# Altium PCB emote2-gsm_gps-pcb_document.PcbDoc
Units mm, origin at the board's own origin, x right, y up, seen from the top; angles counter-clockwise.
Board outline 40 x 40 mm, 2 copper layers (Top Layer, Bottom Layer), stack 1.671 mm thick; 36 components, 63 nets, 204 pads, 96 vias.
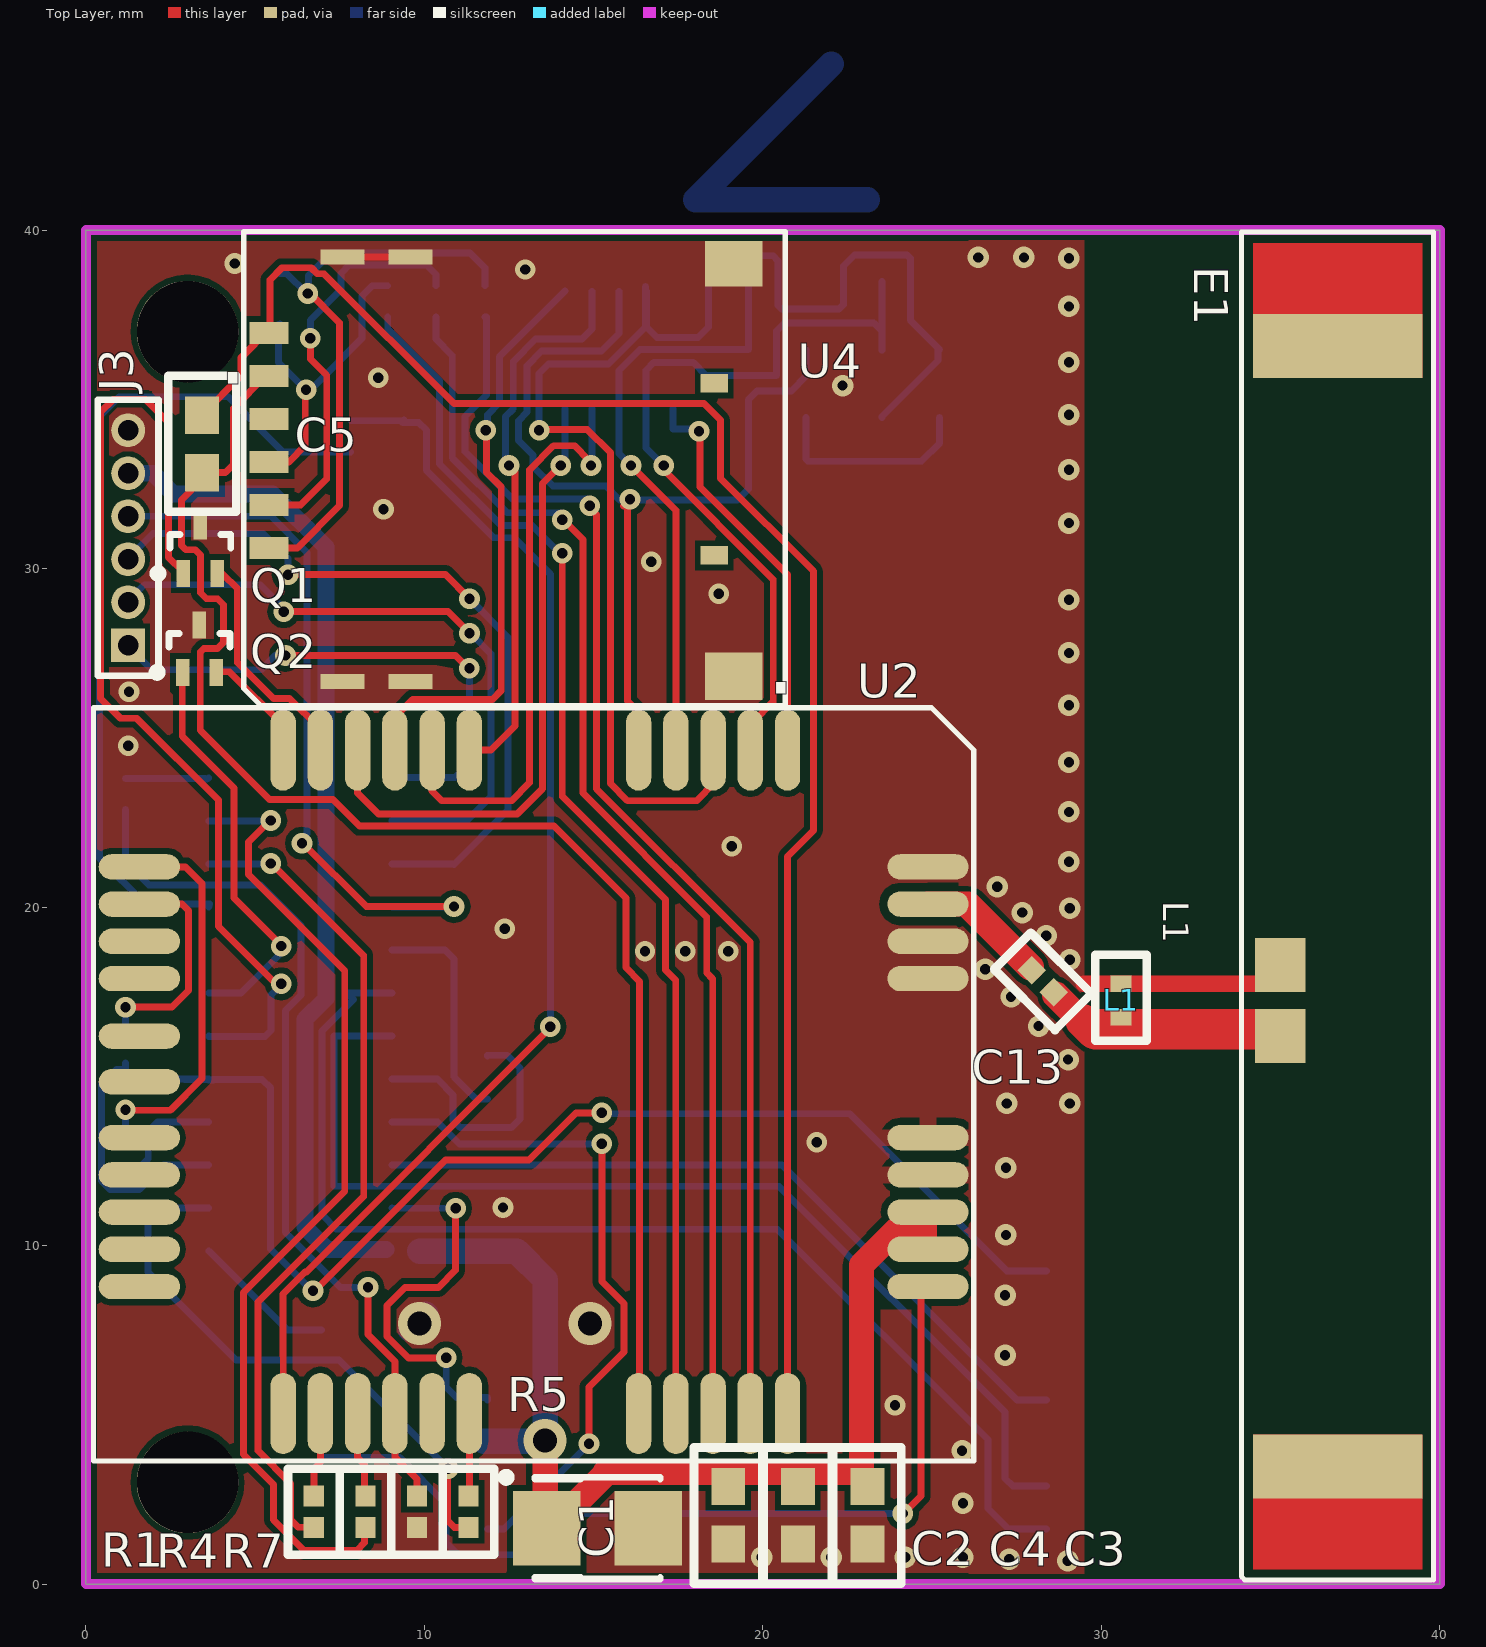
[diagram p0: Top Layer view]
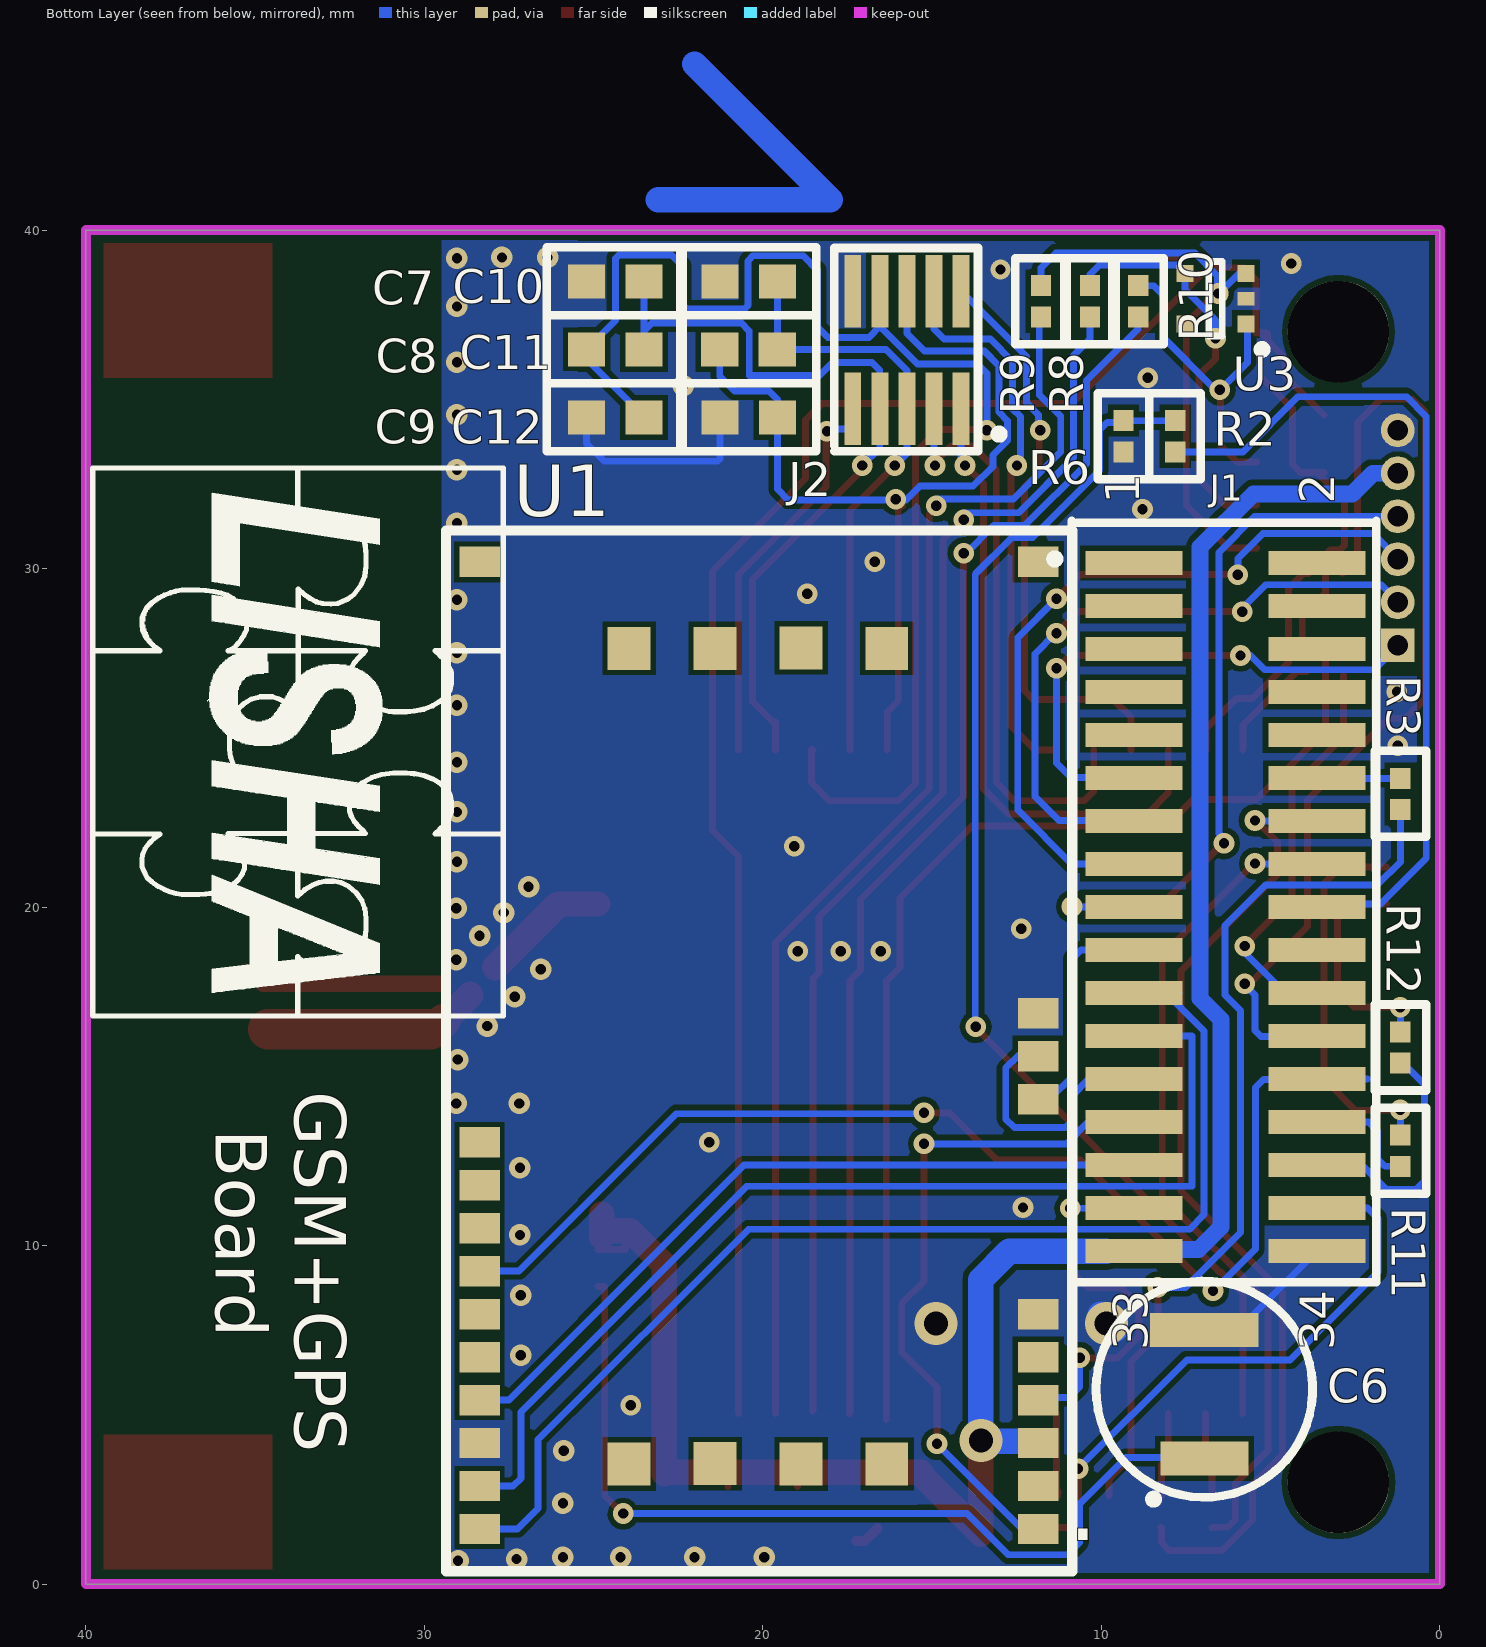
[diagram p1: Bottom Layer view, seen from below]

## Layer stack, top to bottom
Top Layer: signal copper 0.0356
Dielectric: core 1.6, FR-4, Dk 4.3
Bottom Layer: signal copper 0.0356

## Board outline
0,0 40,0 40,40 0,40

## Design rules (kind name [scope] priority, off if disabled: settings)
Clearance Clearance_5 [InNamedPolygon('Top Layer-No Net1_1')] p1: gap=0.25
Clearance Clearance_4 [InNamedPolygon('Top Layer-No Net3')] p2: gap=0.2
Clearance Clearance_3 [InNamedPolygon('Bottom Layer-No Net2')] p3: gap=0.17
Clearance Clearance_2 [InNamedPolygon('Top Layer-No Net2') Or  InNamedPolygon('Top Layer-No Net2')] p4: gap=0.18
Clearance Clearance_1 [InNamedPolygon('Top Layer-No Net1')] p5: gap=0.15
Clearance [All] p6: gap=0.15
ComponentClearance [All] p1: gap=0.051 collisioncheckmode=3 verticalgap=0.254 showdistances=FALSE
FabricationTestPointUsage TestPointUsage [All] p1: valid=0 allowmultiple=FALSE
FabricationTestpoint Testpoint [(IsPad And (OnTopLayer Or OnBottomLayer))] p1: side=3 testpointundercomponent=TRUE minsize=1.016 maxsize=2.54 preferedsize=1.524 minholesize=0 maxholesize=1.016 preferedholesize=0.813 testpointgrid=0.025 allowsidetop=TRUE allowsidebottom=TRUE usegrid=TRUE gridtolerance=0
HoleSize [All] p1: absolutevalues=TRUE maxlimit=5.08 minlimit=0.025 maxpercent=80.000 minpercent=20.000
PolygonConnect PolygonConnect_15 [All vs IsNamedPolygon('Top Layer-No Net1_1')] p1: connectstyle=Direct reliefconductorwidth=0.254 reliefentries=4 polygonreliefangle="90 Angle"
PolygonConnect PolygonConnect_14 [All vs IsNamedPolygon('Bottom Layer-No Net2')] p2: connectstyle=Direct reliefconductorwidth=0.254 reliefentries=4 polygonreliefangle="90 Angle"
PolygonConnect PolygonConnect_13 [All vs IsNamedPolygon('Top Layer-No Net2') Or  IsNamedPolygon('Top Layer-No Net2')] p3: connectstyle=Direct reliefconductorwidth=0.254 reliefentries=4 polygonreliefangle="90 Angle"
PolygonConnect PolygonConnect_12 [All vs IsNamedPolygon('Bottom Layer-No Net')] p4: connectstyle=Direct reliefconductorwidth=0.254 reliefentries=4 polygonreliefangle="90 Angle"
PolygonConnect PolygonConnect_11 [All vs IsNamedPolygon('Top Layer-No Net')] p5: connectstyle=Direct reliefconductorwidth=0.254 reliefentries=4 polygonreliefangle="90 Angle"
PolygonConnect PolygonConnect_10 [All vs IsNamedPolygon('Top Layer-No Net')] p6: connectstyle=Relief reliefconductorwidth=0.254 reliefentries=4 polygonreliefangle="90 Angle"
PolygonConnect PolygonConnect_9 [All vs IsNamedPolygon('Top Layer-No Net')] p7: connectstyle=Direct reliefconductorwidth=0.254 reliefentries=4 polygonreliefangle="90 Angle"
PolygonConnect PolygonConnect_8 [All vs IsNamedPolygon('Top Layer-No Net')] p8: connectstyle=Relief reliefconductorwidth=0.254 reliefentries=4 polygonreliefangle="90 Angle"
PolygonConnect PolygonConnect_7 [All vs IsNamedPolygon('Top Layer-No Net')] p9: connectstyle=Direct reliefconductorwidth=0.254 reliefentries=4 polygonreliefangle="90 Angle"
PolygonConnect PolygonConnect_6 [All vs IsNamedPolygon('Top Layer-No Net')] p10: connectstyle=Relief reliefconductorwidth=0.254 reliefentries=4 polygonreliefangle="90 Angle"
PolygonConnect PolygonConnect_5 [All vs IsNamedPolygon('Top Layer-No Net1')] p11: connectstyle=Direct reliefconductorwidth=0.254 reliefentries=4 polygonreliefangle="90 Angle"
PolygonConnect PolygonConnect_4 [All vs IsNamedPolygon('Top Layer-No Net1')] p12: connectstyle=Direct reliefconductorwidth=0.254 reliefentries=4 polygonreliefangle="90 Angle"
PolygonConnect PolygonConnect_3 [All vs IsNamedPolygon('Top Layer-No Net')] p13: connectstyle=Direct reliefconductorwidth=0.254 reliefentries=4 polygonreliefangle="90 Angle"
PolygonConnect PolygonConnect_2 [All vs IsNamedPolygon('Top Antenna - GND') Or  IsNamedPolygon('Bottom Antenna - GND')] p14: connectstyle=Direct reliefconductorwidth=0.254 reliefentries=4 polygonreliefangle="90 Angle"
PolygonConnect PolygonConnect_1 [All vs IsNamedPolygon('Bottom Layer-No Net 1')] p15: connectstyle=Direct reliefconductorwidth=0.254 reliefentries=4 polygonreliefangle="90 Angle"
PolygonConnect [All] p16: connectstyle=Relief reliefconductorwidth=0.508 reliefentries=4 polygonreliefangle="90 Angle"
RoutingCorners [All] p1: cornerstyle=45-Degree minsetback=1.27 maxsetback=1.27
RoutingVias [All] p1: holewidth=0.305 width=0.61 viastyle="Through Hole" minholewidth=0.254 minwidth=0.559 maxholewidth=0.711 maxwidth=1.27
SMDNeckDown [All] p1: percent=50.000
SilkscreenOverComponentPads [All] p1: minsilkscreentomaskgap=0
SolderMaskExpansion [All] p1: expansion=0.102
Width [All] p1: maxlimit=2.54 minlimit=0.15 preferedwidth=0.15
22 further rules are at their usual default settings.

## Components (designator, comment, footprint, x,y, rotation, side; value= is the part's Value field where it differs from the comment)
C1 "100uF" TC3528-1411 15.113,1.651 r0 top
C2 "10pF" 0603 18.974,2.032 r90 top
C3 "33pF" 0603 23.089,2.032 r90 top
C4 "100nF" 0603 21.031,2.032 r90 top
C5 "100nF" 0603 3.429,33.68 r270 top
C6 "60mF (*)" PAS414HR-VE5R 6.96,5.207 r90 bottom
C7 "33pF(*)" 0603 24.364,38.481 r180 bottom
C8 "33pF(*)" 0603 24.364,36.474 r180 bottom
C9 "33pF(*)" 0603 24.364,34.468 r180 bottom
C10 "33pF(*)" 0603 20.422,38.481 r180 bottom
C11 "33pF(*)" 0603 20.427,36.474 r180 bottom
C12 "33pF(*)" 0603 20.422,34.468 r180 bottom
C13 "3.3pF" 0402#1 28.27,17.805 r135 top
E1 "PA.25A" PA-25A_ANTENA 34.483,39.624 r270 top locked
J1 "Header 17X2M" FTR-117-D-BOTTOM 3.627,30.16 r90 bottom locked
J2 "Header 5X2(*)" "BB080 2x5 CON" 14.148,34.722 r180 bottom
J3 "Header 6" MHDR1X6 1.245,27.737 r90 top
L1 "2nH" 0402#2 30.582,17.323 r270 top
Q1 "DTC143ZE" SOT416-3L 3.378,30.556 r90 top
Q2 "DTC143ZE" SOT416-3L 3.353,27.635 r90 top
R1 "1K" 0402#3 6.731,2.134 r90 top
R2 "1K" 0402#3 7.824,33.909 r90 bottom
R3 "1K" 0402#3 1.168,23.343 r270 bottom
R4 "1K" 0402#3 8.255,2.134 r90 top
R5 "1K" 0402#3 11.303,2.134 r90 top
R6 "5K6" 0402#3 9.348,33.909 r270 bottom
R7 "5K6" 0402#3 9.779,2.134 r270 top
R8 "22R" 0402#3 10.338,37.897 r90 bottom
R9 "22R" 0402#3 11.786,37.897 r90 bottom
R10 "22R" 0402#3 8.915,37.897 r90 bottom
R11 "1K" 0402#3 1.168,12.802 r90 bottom
R12 "1K" 0402#3 1.168,15.85 r90 bottom
U1 "A2035-H" A2035-H 11.862,1.626 r0 bottom
U2 "M95" M95 20.726,24.638 r270 top
U3 "PESD5V0L4UG" SOT353/SC-88A 6.629,37.973 r0 bottom
U4 "CONN-SIM" MICRO-SIM 5.41,36.957 r0 top

## Footprints (in the part's own frame and the unit in brackets; to place one, negate y for a bottom-side part, rotate by r counter-clockwise, add the part's x,y. Pads: shape width x height; smd on the part's side, far side on the other; paste and mask are expansions set on the pad)
0402#1 [mm]
  rect 0.6x0.6 smd: 1(0.46,0) 2(-0.46,0)
  silkscreen extent -1.27,-0.76 1.27,0.76, body extent -0.79,-0.79 0.79,0.79, height 0.2
0402#2 [mm]
  rect 0.5x0.62 smd: 1(0.578,0) 2(-0.412,0)
  silkscreen extent -1.27,-0.76 1.27,0.76, body extent -0.5,-0.3 0.5,0.3, height 0.2
0402#3 [mm]
  rect 0.62x0.6 smd: 1(0.46,0) 2(-0.46,0)
  silkscreen extent -1.27,-0.76 1.27,0.76, body extent -0.5,-0.3 0.5,0.3, height 0.2
0603 [mm]
  rect 1.1x1 smd: 1(-0.85,0) 2(0.85,0)
  silkscreen extent -2.02,-1 2,1.01, body extent -1,-0.5 1,0.5, height 1
A2035-H [mm]
  rect 1.2x0.9 smd: 1(0,0) 2(0,-1.27) 3(0,-2.54) 4(0,-3.81) 5(0,-5.08) 6(0,-6.35) 7(0,-12.7) 8(0,-13.97) 9(0,-15.24) 10(0,-28.57) 11(16.51,-28.57) 12(16.51,-11.43) 13(16.51,-10.16) 14(16.51,-8.89) 15(16.51,-7.62) 16(16.51,-6.35) 17(16.51,-5.08) 18(16.51,-3.81) 19(16.51,-2.54) 20(16.51,-1.27) 21(16.51,0)
  rect 1.27x1.27 smd: 22(4.481,-1.92) 23(7.01,-1.92) 24(9.55,-1.93) 25(12.09,-1.92) 26(4.481,-26.02) 27(7.01,-26.03) 28(9.55,-26.02) 29(12.09,-26.02)
  silkscreen extent -1,-29.5 17.5,1.25, body extent 0,-29.5 16.5,1, height 1
"BB080 2x5 CON" [mm] "Header Connector"
  rect 0.5x2.13 smd: 1(0,0) 2(0,3.47) 3(-0.8,0) 4(-0.8,3.47) 5(-1.6,0) 6(-1.6,3.47) 7(-2.4,0) 8(-2.4,3.47) 9(-3.2,0) 10(-3.2,3.47)
  silkscreen extent -3.75,-1.25 1.25,4.75, body extent -3.75,0.25 0.5,3.25, height 1
FTR-117-D-BOTTOM [mm] "Header Connector"
  rect 0.711x2.87 smd: 1(0,5.41) 2(0,0) 3(-1.27,5.41) 4(-1.27,0) 5(-2.54,5.41) 6(-2.54,0) 7(-3.81,5.41) 8(-3.81,0) 9(-5.08,5.41) 10(-5.08,0) 11(-6.35,5.41) 12(-6.35,0) 13(-7.62,5.41) 14(-7.62,0) 15(-8.89,5.41) 16(-8.89,0) 17(-10.16,5.41) 18(-10.16,0) 19(-11.43,5.41) 20(-11.43,0) 21(-12.7,5.41) 22(-12.7,0) 23(-13.97,5.41) 24(-13.97,0) 25(-15.24,5.41) 26(-15.24,0) 27(-16.51,5.41) 28(-16.51,0) 29(-17.78,5.41) 30(-17.78,0) 31(-19.05,5.41) 32(-19.05,0) 33(-20.32,5.41) 34(-20.32,0)
  silkscreen extent -21.25,-1.75 1.25,7.88, body extent -20.92,-0.5 0.92,5.96, height 6.1
M95 [mm] "Quectel GSM - M95"
  oval 2.4x0.75 smd: 1(0,0) 2(0,-1.1) 3(0,-2.2) 4(0,-3.3) 5(0,-4.4) 6(0,-9.4) 7(0,-10.5) 8(0,-11.6) 9(0,-12.7) 10(0,-13.8) 11(0,-14.9) 21(19.6,-14.9) 22(19.6,-13.8) 23(19.6,-12.7) 24(19.6,-11.6) 25(19.6,-10.5) 26(19.6,-9.4) 27(19.6,-4.4) 28(19.6,-3.3) 29(19.6,-2.2) 30(19.6,-1.1) 31(19.6,0)
  oval 0.75x2.4 smd: 12(3.45,-19.15) 13(4.55,-19.15) 14(5.65,-19.15) 15(6.75,-19.15) 16(11.45,-19.15) 17(12.55,-19.15) 18(13.65,-19.15) 19(14.75,-19.15) 20(15.85,-19.15) 32(15.85,4.15) 33(14.75,4.15) 34(13.65,4.15) 35(12.55,4.15) 36(11.45,4.15) 37(6.75,4.15) 38(5.65,4.15) 39(4.55,4.15) 40(3.45,4.15) 41(8.45,-19.15) 42(9.8,-19.15)
  silkscreen extent -1.25,-20.5 21,5.5, body extent -0.25,-19.5 20,4.5, height 1
MHDR1X6 [mm] "Connector; Header; 6 Position"
  rect 1x1 hole 0.6: 1(0,0)
  round 1 hole 0.6: 2(1.27,0) 3(2.54,0) 4(3.81,0) 5(5.08,0) 6(6.35,0)
  silkscreen extent -0.9,-0.9 7.25,0.9
MICRO-SIM [mm] "Micro SIM Connector 1.45mm, Push Pull"
  rect 1.15x0.65 smd: 1(0,-1.27) 2(0,-3.81) 3(0,-6.35) 5(0,0) 6(0,-2.54) 7(0,-5.08)
  rect 0.8x0.54 smd: 4(13.15,-1.485) 8(13.15,-6.565)
  rect 1.3x0.45 smd: 9(2.17,2.245) 10(4.17,2.245) 11(2.17,-10.295) 12(4.17,-10.295)
  rect 1.7x1.34 smd: 13(13.73,2.053)
  rect 1.7x1.4 smd: 14(13.73,-10.135)
  silkscreen extent -0.75,-11 15.25,3, body extent -0.5,-10.62 15,2.63, height 1
PA-25A_ANTENA [mm]
  rect 1.6x1.5 smd: 1(23.434,0.8) 2(21.339,0.8)
  rect 1.9x5 smd: 3(3.05,2.5) 4(36.15,2.5)
  Top Layer region: 35.2,0 39.2,0 39.2,5 35.2,5
  Top Layer region: 0,0 4,0 4,5 0,5
  silkscreen extent -0.32,-0.35 39.5,5.33, body extent 2,0 37.2,5, height 1
PAS414HR-VE5R [mm] "Coin Type Polyacene Capacitors"
  rect 1x2.6 smd: 1(-1.5,0)
  rect 1x3.2 smd: 2(2.3,0)
  silkscreen extent -2.82,-3.2 3.75,3.2
SOT353/SC-88A [mm]
  rect 0.5x0.5 smd: 1(-0.9,0.75) 3(-0.9,-0.75) 4(0.9,-0.75) 5(0.9,0.75)
  rect 0.5x0.4 smd: 2(-0.9,0)
  silkscreen extent -1.5,-1.1 0.2,1.62, body extent -1.25,-1.25 1.25,1.25
SOT416-3L [mm] "SOT416, 3-Leads, Body 1.6x0.8mm, Pitch 0.50mm, Lead Span 1.6mm, IPC High Density"
  rect 0.8x0.4 smd: 1(-0.7,0.5) 2(-0.7,-0.5) 3(0.7,0)
  silkscreen extent -0.82,-0.9 0.45,1.37, body extent -0.45,-0.9 0.45,0.9, height 0.95
TC3528-1411 [mm] "Capacitor, SM Tantalum; Body 3.5 x 2.8 mm (LxW typ)"
  rect 2x2.2 smd: 1(-1.5,0) 2(1.5,0)
  silkscreen extent -2.82,-1.5 1.85,1.62

## Part data
C1 C6: library part C-POL, "Capacitor Polarised"
C2: library part C0603C10pF, "CAP CERAMIC 10pF 25V X5R 0603"
C3: library part C0603C33pF, "CAP CERAMIC 33pF 25V X5R 0603"
C4 C5: library part C0603C100nF, "CAP CERAMIC 100nF 6.3V X5R 0603"
C7 C8 C9 C10 C11 C12 C13: library part CAP, "Capacitor"
E1: library part ANTENNA-PA25A, "ANTENNA 6-BAND SMT"
J1: "SAMTEC - FTR-117-03-S-D - HEADER, 1.27 X 2.54MM, SMD, 2X17POS"
J2: library part "Header 5X2", "Header, 5-Pin, Dual row"
J3: "Header, 6-Pin"
L1: library part 74477420, "INDUCTOR POWER 100UH .57A SMD"
Q1 Q2: library part T-DTC143Z, "NPN General Purpose Amplifier"
R1 R2 R3 R4 R5: library part R-1K-0402, "RES 1K OHM 1/16W 0402 SMD"
R6 R7: library part R-5K6-0402, "RES 5K6 OHM 1/16W 0402 SMD"
R8 R9 R10: library part R-22-0402, "RES 22 OHM 1/16W 0402 SMD"
R11 R12: library part R-SMD-0402, "RES 1/16W 0402 SMD"
U1: "GPS Receiver + Antenna"
U2: library part GSM-M95, "M95 Quectel Cellular Engine"
U3: "Very low capacitance unidirectional quadruple ESD protection diode arrays"
U4: "Micro SIM Connector 1.45mm, Push Pull"

## Free pads (board coordinates)
  round 3 hole 3 unplated: 1(3,37) 2(3,3)

## Via types
v1: diameter 0.61, hole 0.305, Top Layer to Bottom Layer, 49 vias
v2: diameter 0.635, hole 0.305, Top Layer to Bottom Layer, tented both sides, 38 vias
v3: diameter 1.27, hole 0.711, Top Layer to Bottom Layer, 3 vias
v4: diameter 0.6, hole 0.305, Top Layer to Bottom Layer, tented both sides, 3 vias
v5: diameter 0.6/0.6 (per signal layer), hole 0.305, Top Layer to Bottom Layer, tented both sides, 2 vias
v6: diameter 0.6, hole 0.305, Top Layer to Bottom Layer, 1 vias

## Nets (pads, with @x,y where several pads share a name; then routed paths per layer and width w, separated by ;. In a path a pad name is that pad's centre, name@x,y a point inside that pad or via, vN(x,y) a via of type N, cw(c..) or ccw(c..) an arc to the next point about the centre after c; other vN are vias at no path point)
3.3V: C1.1 C2.2 C3.2 C4.2 J1.33 J3.5 U1.3 U2.33 U2.34 | length 71.9
  Top Layer w0.203: v3(13.564,4.242) 13.613,4.125 C1.1 ; C2.2 C2.2@18.974,2.886 ; C4.2 C4.2@21.031,2.886 ; 23.089,9.43 24.063,10.404 ; 23.927,10.439 24.063,10.439 ; U2.33 24.063,9.888 24.063,10.404 ; U2.34 24.646,10.988 24.098,10.439 ; 24.063,10.404 24.063,10.439 ; 24.063,10.404 24.098,10.439 ; 24.063,10.439 24.098,10.439
  Top Layer w0.75: v3(13.564,4.242) 13.564,1.475 15.34,3.251 C1.1@13.613,1.524 ; 15.34,3.302 C3.2@22.911,3.302 ; C3.2@22.911,3.251 22.911,9.423 23.927,10.439 24.765,10.439 ; U2.33@24.765,10.236 U2.34@24.765,10.795 ; 24.765,10.363 U2.34@24.765,10.922
  Bottom Layer w0.203: v3@13.564,4.166 v3(13.564,4.242)
  Bottom Layer w0.5: J3.5 1.981,32.817 2.591,32.207 5.512,32.207 7.087,30.632 7.087,17.297 6.464,16.675 6.464,10.546 7.129,9.881 J1.33@8.865,9.881
  Bottom Layer w0.75: J1.33@9.855,9.83 12.725,9.83 13.564,8.992 v3@13.564,4.293 ; U1.3@11.76,4.216 v3@13.64,4.216
ADC0: J1.4
ADC1: J1.6
ADC1_VREFH: J1.2
ADC2: J1.8
ADC3: J1.10
ADC4: J1.1
ADC5: J1.3
ADC6: J1.5
ADC7_RTCK: J1.7
GND: C1.2 C2.1 C3.1 C4.1 C6.2 C7.1 C9.1 C10.1 C12.1 E1.2 J1.34 J2.10 J3.6 L1.2 Q1.3 Q2.3 R6.1 R7.1 U1.6 U1.9 U1.19 U2.35 U2.36 U2.37 U2.38 U2.40 U3.2 U4.9 U4.10 U4.11 U4.12 U4.13 U4.14 | length 20
  Top Layer w0.203: U4.9 U4.10 ; E1.2@34.763,17.755 34.763,17.704 E1.2@35.283,18.224
  Top Layer w0.3: C1.2 16.994,1.27 C1.2@17.247,1.27
  Top Layer w0.5: 29.489,17.735 E1.2@34.763,17.735
  Bottom Layer w0.203: J1.34 5.96,7.507 C6.2 ; C12.1 21.272,33.236 21.336,33.171 24.689,33.171 25.214,33.696 C9.1
  Bottom Layer w0.75: v3@9.576,7.518 v3(9.855,7.696) v3@10.033,7.976
  other v1: 23.901,5.283 12.319,11.125 21.59,13.056 12.37,19.355 19.075,21.793 1.245,24.765 1.27,26.365 18.694,29.261 8.788,31.75 8.636,35.636 4.394,39.014
  other v2: 29.007,0.686 27.28,0.737 19.964,0.787 22.022,0.787 24.206,0.787 25.908,0.787 25.908,2.388 25.883,3.937 27.153,6.756 27.153,8.534 27.178,10.312 27.178,12.294 27.203,14.199 29.065,14.199 29.015,15.494 28.143,16.485 27.33,17.348 26.568,18.161 29.065,18.44 28.372,19.152 27.661,19.837 29.065,19.964 26.924,20.599 29.04,21.338 29.04,22.809 29.04,24.282 29.04,25.959 29.04,27.508 29.04,29.083 29.04,31.345 29.04,32.918 29.04,34.544 22.352,35.408 29.04,36.093 29.04,37.744 29.04,39.167 26.365,39.192 27.711,39.192
  other v3: 14.884,7.696
  other v4: 17.704,18.694 18.974,18.694 16.696,30.201
  other v5: 16.518,18.694 12.979,38.837
GPS_ON/OFF: J1.29 U1.18 | length 22.2
  Bottom Layer w0.203: J1.29 20.564,12.38 27.508,5.436 U1.18
GPS_RST: J1.27 U1.1 | length 20.1
  Top Layer w0.203: v1(14.859,4.14) 14.859,5.817 15.9,6.858 15.9,8.28 15.24,8.941 v1(15.24,13.005)
  Bottom Layer w0.203: J1.27 10.391,13.65 11.036,13.005 v1(15.24,13.005) ; U1.1 12.344,1.626 v1(14.859,4.14)
GSM_AGND: J2.9 U2.1 | length 11.9
  Top Layer w0.203: v1@18.136,34.036 18.136,32.41 20.726,29.82 U2.1
  Bottom Layer w0.203: J2.9 17.348,34.128 18.11,34.128 v1(18.11,34.061)
GSM_EMERG_OFF: J1.22 Q2.1 | length 12.1
  Top Layer w0.2: 2.845,25.044 Q2.1@2.845,26.848
  Top Layer w0.203: 2.845,25.044 4.369,23.52 4.369,20.269 5.779,18.859 v1(5.766,18.847)
  Bottom Layer w0.203: J1.22 4.582,17.46 5.817,18.694 5.817,18.847 v1(5.766,18.847)
GSM_LOUDSPKN: J2.2 U2.8 | length 17.3
  Top Layer w0.203: U2.8 9.126,25.611 9.652,26.137 12.014,26.137 12.268,26.391 12.268,32.41 11.836,32.842 v1@11.836,34.087
  Bottom Layer w0.203: v1@11.862,34.112 11.862,34.544 12.217,34.9 12.217,36.261 J2.2@14.153,38.197
  other v1: 11.811,34.087
GSM_LOUDSPKP: J2.1 U2.9 | length 18.8
  Top Layer w0.203: U2.9 8.026,23.367 8.645,22.749 12.741,22.749 13.487,23.495 13.487,32.512 v1@13.995,33.02
  Bottom Layer w0.203: v1(14.03,33.045) 14.148,33.103 J2.1
GSM_MIC1N: C11.1 C12.2 J2.6 U2.5 | length 27.7
  Top Layer w0.2: v1@16.002,32.004 16.002,26.086 16.326,25.761 U2.5
  Top Layer w0.203: v1@15.875,31.848 v1(16.072,32.045)
  Bottom Layer w0.203: J2.6 15.748,36.947 15.224,36.424 13.462,36.424 13.03,35.992 13.03,34.62 12.776,34.366 12.776,33.782 13.208,33.35 13.208,33.019 13.791,32.436 15.361,32.436 15.768,32.029 15.783,32.045 v1(16.072,32.045) ; v1@16.104,32.029 19.253,32.029 19.572,32.348 C12.2 19.572,34.996 19.821,35.245 20.837,35.245 21.277,35.686 C11.1
GSM_MIC1P: C10.2 C11.2 J2.5 U2.4 | length 18
  Top Layer w0.203: v1@16.104,33.045 17.426,31.723 U2.4
  Bottom Layer w0.203: v1(16.103,33.045) 15.748,33.401 J2.5 15.748,35.856 16.366,36.474 C11.2 ; C11.2@19.558,36.474 19.572,36.488 C10.2
GSM_MIC2N: C8.1 C9.2 J2.8 U2.3 | length 44
  Top Layer w0.203: v1(13.386,34.087) 13.386,34.112 14.808,34.112 15.494,33.426 15.494,23.65 16.005,23.139 18.034,23.139 18.567,23.673 18.567,24.638 18.567,24.663 U2.3
  Bottom Layer w0.203: v1(13.386,34.087) 13.386,35.76 13.669,36.043 15.432,36.043 J2.8@16.542,37.153 ; J2.8@16.535,38.329 J2.8@16.535,37.16 ; J2.8 J2.8@16.558,38.192 ; C9.2 23.52,34.468 23.52,34.493 25.171,36.144 25.171,36.474 C8.1 24.359,37.33 24.359,39.167 24.257,39.268 22.708,39.268 22.377,38.938 22.377,37.795 22.25,37.668 20.549,37.668 20.447,37.77 20.447,39.091 20.295,39.243 18.821,39.243 18.39,38.811 18.39,37.135 18.085,36.83 16.866,36.83 J2.8@16.535,37.16 ; J2.8@16.535,37.16 J2.8@16.542,37.153 ; J2.8@16.535,37.16 J2.8@16.542,37.153 ; J2.8@16.542,37.153 16.548,37.159 J2.8@16.558,37.159 ; J2.8@16.542,37.153 J2.8@16.558,37.138 ; J2.8@16.542,37.153 J2.8@16.558,37.138 ; J2.8@16.558,37.138 J2.8@16.558,37.159 ; J2.8@16.558,37.159 J2.8@16.558,38.192 ; J2.8@16.558,37.159 J2.8@16.558,38.192
GSM_MIC2P: C7.2 C8.2 J2.7 U2.2 | length 24.3
  Top Layer w0.203: v1@17.031,32.956 20.303,29.684 20.303,26.069 19.701,25.466 19.626,25.466 U2.2
  Bottom Layer w0.203: v1(17.069,33.045) 16.548,33.566 J2.7 16.548,35.859 16.773,36.084 17.941,36.084 18.322,35.703 20.405,35.703 20.405,37.023 20.634,37.252 23.275,37.252 23.514,37.013 C8.2 ; C7.2 C8.2 ; C8.2@23.52,36.449 23.514,36.455 C8.2
GSM_NETLIGHT: J1.30 R12.2 | length 7.5
  Bottom Layer w0.203: R12.2 1.168,15.198 0.898,15.198 0.457,14.757 0.457,11.913 0.711,11.659 1.575,11.659 2.296,12.38 J1.30
GSM_PWRKEY: J1.24 Q1.1 | length 29.7
  Top Layer w0.18: Q1.1 Q1.1@2.896,29.856
  Top Layer w0.2: 2.438,30.328 Q1.1@2.845,29.921
  Top Layer w0.203: 2.438,30.328 2.438,34.315 1.753,35.001 0.813,35.001 0.432,34.62 0.432,26.162 1.016,25.578 1.499,25.578 3.912,23.165 3.912,19.431 v1@5.664,17.678
  Bottom Layer w0.203: J1.24 3.627,16.18 5.283,16.18 5.461,16.358 5.461,17.399 5.613,17.551 v1@5.766,17.551
  other v1: 5.766,17.729
GSM_RI: J1.32 R5.2 | length 17.1
  Top Layer w0.203: v1@10.677,3.387 10.677,1.877 10.88,1.674 R5.2
  Bottom Layer w0.203: J1.32 2.142,11.11 1.829,10.796 1.829,9.22 4.429,6.62 7.477,6.62 10.719,3.378 v1@10.617,3.378
  other v1: 10.693,3.404
GSM_SPK1N: J2.4 U2.6 | length 16.3
  Top Layer w0.203: U2.6 11.963,24.638 12.675,25.349 12.675,32.868 v1(12.497,33.045)
  Bottom Layer w0.203: v1@12.395,33.147 12.395,34.493 12.624,34.722 12.624,36.119 13.284,36.779 14.649,36.779 14.948,37.078 J2.4
GSM_SPK1P: J2.3 U2.7 | length 17.5
  Top Layer w0.203: U2.7 10.226,23.428 10.515,23.139 12.573,23.139 13.106,23.673 13.106,32.918 13.818,33.63 14.427,33.63 v1@14.868,33.189
  Bottom Layer w0.203: v1@14.948,33.125 J2.3
  other v1: 14.919,33.045
GSM_STATUS: J1.28 R11.2 | length 3.5
  Bottom Layer w0.203: R11.2 1.616,12.342 1.838,12.563 1.838,13.376 2.112,13.65 J1.28
NetC5_1: C5.1 U2.31 U4.5 | length 51.6
  Top Layer w0.203: C5.1 3.454,34.569 4.572,35.687 4.572,36.22 U4.5@5.41,37.059 ; U4.5@5.089,36.763 5.089,36.957 U4.5 ; U4.5@5.436,36.957 5.436,38.532 5.791,38.887 6.655,38.887 6.833,38.71 7.036,38.71 10.871,34.874 18.262,34.874 18.745,34.391 18.745,32.664 21.488,29.921 21.488,22.257 20.726,21.495 U2.31
NetC5_2: C5.2 U2.27 U4.1 | length 43.9
  Top Layer w0.2: 3.378,25.222 3.378,27.534 3.48,27.635 3.886,27.635 4.064,27.813 4.064,28.931 3.886,29.108 3.556,29.108 3.378,29.286
  Top Layer w0.203: 3.378,25.222 5.42,23.18 7.297,23.18 8.084,22.393 13.827,22.393 15.951,20.269 15.951,18.212 16.358,17.805 U2.27@16.358,4.851 ; 3.378,29.286 3.378,30.404 3.226,30.556 2.946,30.556 2.819,30.683 2.819,32.029 3.62,32.83 C5.2 ; C5.2@3.429,32.842 4.115,32.842 4.352,33.08 4.352,34.731 5.309,35.687 U4.1@5.309,35.789
NetC6_1: C6.1 U2.32 | length 26.7
  Top Layer w0.203: v1@24.155,2.083 24.672,2.6 24.672,8.788 U2.32
  Bottom Layer w0.203: C6.1 6.985,3.734 9.271,3.734 10.643,2.362 10.643,1.219 10.998,0.864 12.751,0.864 13.97,2.083 v1(24.13,2.083)
NetC13_1: C13.1 U2.39 | length 3.8
  Top Layer w0.75: U2.39@24.876,20.091 26.06,20.091 U2.39@26.06,20.066
  Top Layer w0.8: U2.39@26.06,20.066 C13.1@27.902,18.224
NetC13_2: C13.2 E1.1 L1.1 | length 6.2
  Top Layer w0.8: C13.2@28.651,17.399 29.413,16.637
  Top Layer w1: 29.439,16.637 29.681,16.395
  Top Layer w1.2: 29.833,16.395 E1.1@34.62,16.395
NetQ1_2: Q1.2 U2.10 | length 6.8
  Top Layer w0.2: Q1.2@3.886,29.845 4.039,29.845 4.47,29.413
  Top Layer w0.203: 4.47,29.413 4.47,27.229 5.537,26.162 6.017,26.162 6.909,25.27 6.909,24.638 U2.10
NetQ2_2: Q2.2 U2.11 | length 3.3
  Top Layer w0.2: Q2.2@3.94,26.949 4.242,26.949 U2.11@5.817,25.375
  Top Layer w0.203: U2.11@5.817,25.375 5.817,24.714 U2.11
NetR1_1: R1.1 U2.22 | length 2.5
  Top Layer w0.203: R1.1 6.731,3.404 6.926,3.599 U2.22
NetR2_1: R2.1 R6.2 U2.21 | length 36.8
  Top Layer w0.203: U2.21 5.826,6.721 5.817,6.731 5.817,8.563 6.474,9.221 6.51,9.221 v1@13.741,16.452
  Bottom Layer w0.203: R2.1 R6.2 9.375,34.369 9.398,34.392 9.372,34.353 9.347,34.315 9.83,34.315 10.058,34.087 10.058,32.893 12.04,30.912 12.649,30.912 13.729,29.832 v1@13.729,16.383
  other v1: 13.716,16.459
NetR3_1: R3.1 R7.2 U2.24 | length 26.6
  Top Layer w0.203: v1(8.331,8.763) 8.331,7.371 9.126,6.576 U2.24 9.126,3.751 9.779,3.099 R7.2@9.779,2.616
  Bottom Layer w0.203: R3.1 1.168,21.336 1.854,20.65 5.156,20.65 6.35,19.457 6.35,17.399 5.893,16.942 5.893,10.387 7.517,8.763 v1(8.331,8.763)
NetR4_1: R4.1 U2.23 | length 2.5
  Top Layer w0.203: U2.23 8.026,3.734 8.23,3.531 R4.1@8.23,2.591
NetR5_1: R5.1 U2.26 | length 2.5
  Top Layer w0.203: R5.1 11.278,2.695 11.278,2.733 11.303,2.733 11.326,2.733 U2.26
NetR8_1: R8.1 U3.4 U4.7 | length 12
  Top Layer w0.203: U4.7 6.343,31.877 7.112,32.646 7.112,35.712 6.629,36.195 v1(6.629,36.805)
  Bottom Layer w0.203: v1(6.629,36.805) 6.629,37.338 7.529,38.238 U3.4 7.77,38.964 10.057,38.964 10.338,38.683 R8.1
NetR8_2: R8.2 U2.29 | length 36.7
  Top Layer w0.203: v1@14.072,31.471 14.681,30.861 14.681,23.368 18.339,19.71 18.339,18.059 18.517,17.882 18.517,5.131 U2.29@18.542,5.105
  Bottom Layer w0.203: R8.2 10.338,36.779 10.82,36.297 10.82,33.274 12.446,31.648 14.072,31.648 14.08,31.64 v1@14.08,31.435
  other v1: 14.072,31.445
NetR9_1: R9.1 U3.3 U4.3 | length 17
  Top Layer w0.203: U4.3 6.242,30.607 7.493,31.858 7.493,37.262 v1@6.591,38.163
  Bottom Layer w0.203: U3.3 5.93,38.723 v1@6.528,38.125 ; v1@6.579,38.151 6.579,38.659 7.239,39.319 11.344,39.319 11.349,39.324 11.786,38.887 R9.1
  other v1: 6.553,38.125
NetR9_2: R9.2 U2.30 | length 37.5
  Top Layer w0.2: U2.30 19.626,18.955
  Top Layer w0.203: v1@14.834,31.852 15.088,31.598 15.088,23.494 19.626,18.955
  Bottom Layer w0.203: R9.2 11.836,37.437 11.836,35.128 11.201,34.493 11.201,33.452 12.598,32.055 14.834,32.055 v1(14.884,31.852)
NetR10_1: R10.1 U3.1 U4.2 | length 9.6
  Top Layer w0.203: U4.2 5.994,33.147 6.477,33.63 v1@6.477,35.179
  Bottom Layer w0.203: U3.1 5.69,37.211 5.69,36.093 v1(6.502,35.281) 6.508,35.382 6.731,35.382 8.153,36.805 8.153,38.049 8.461,38.357 R10.1
NetR10_2: R10.2 U2.28 | length 36.5
  Top Layer w0.203: v1(14.072,30.455) 14.072,23.266 17.12,20.218 17.12,18.136 17.424,17.831 17.424,5.055 U2.28@17.45,5.029
  Bottom Layer w0.203: R10.2 8.915,37.083 10.439,35.559 10.439,33.096 12.268,31.267 13.183,31.267 v1@14.008,30.442
NetR11_1: R11.1 U2.12 | length 11.2
  Top Layer w0.203: v6@1.168,13.995 2.489,13.995 3.429,14.935 3.429,20.701 2.942,21.188 U2.12
  Bottom Layer w0.203: R11.1 1.143,13.284 1.144,13.286 1.168,13.31 v6@1.168,13.995
  other v6: 1.168,14.013
NetR12_1: R12.1 U2.13 | length 6.7
  Top Layer w0.203: v1(1.168,17.043) 2.54,17.043 3.03,17.534 3.03,19.899 2.841,20.088 U2.13
  Bottom Layer w0.203: R12.1 v1(1.168,17.043)
REF2: J1.9
SPI_MISO: J1.23 U1.20 | length 32
  Bottom Layer w0.203: J1.23 7.324,16.19 7.324,11.75 20.481,11.75 27.153,5.079 27.153,3.124 27.381,2.896 U1.20
SPI_MOSI: J1.21 U1.21 | length 34.8
  Bottom Layer w0.203: J1.21 7.71,17.46 7.898,17.271 7.514,16.887 7.514,16.883 6.968,16.337 6.968,10.913 7.401,10.48 20.431,10.48 26.645,4.267 26.645,2.235 27.254,1.626 U1.21
SPI_SCK: J1.19 U1.7 | length 6.7
  Bottom Layer w0.203: J1.19 10.607,18.73 10.871,18.466 10.871,14.986 11.455,14.402 11.532,14.326 U1.7
SPI_SS_GPS: J1.25 U1.8 | length 7.6
  Bottom Layer w0.203: J1.25 10.378,14.92 10.846,14.453 10.846,13.698 11.056,13.487 12.573,13.487 12.827,13.741 12.827,15.24 12.446,15.621 11.862,15.621 U1.8
TIMEMARK_GPS: J1.26 U1.15 | length 37.2
  Top Layer w0.203: v1@6.731,8.636 10.617,12.522 13.081,12.522 14.478,13.919 v1(15.24,13.919)
  Bottom Layer w0.203: J1.26 2.142,14.92 3.626,14.887 3.759,14.884 3.734,14.91 5.207,14.91 5.448,14.668 5.448,9.893 v1@6.655,8.687 ; v1@15.24,13.894 22.555,13.894 27.203,9.246 U1.15
  other v1: 6.706,8.662
TMR3: J1.20
UART1_CTS: J1.13 J3.2 | length 19.3
  Top Layer w0.203: v1(5.842,28.727) 10.693,28.727 v1(11.328,28.092)
  Bottom Layer w0.203: J3.2 1.232,29.019 1.735,29.523 5.144,29.523 5.842,28.825 v1(5.842,28.727) ; J1.13 9.037,22.555 11.252,22.555 11.963,23.266 11.963,27.483 11.354,28.092 v1(11.328,28.092)
UART1_RTS: J1.11 J3.1 | length 16
  Top Layer w0.203: v1(5.893,27.432) 10.922,27.432 11.303,27.051 v1(11.328,27.051)
  Bottom Layer w0.203: J3.1 1.232,27.724 1.945,27.01 5.167,27.01 5.589,27.432 v1(5.893,27.432) ; J1.11 9.068,23.825 10.897,23.825 11.328,24.257 v1(11.328,27.051)
UART1_RX: J1.15 J3.3 | length 22.3
  Top Layer w0.203: v1(5.969,29.82) 10.617,29.82 v1(11.328,29.108)
  Bottom Layer w0.203: J3.3 1.232,30.289 1.981,31.039 5.232,31.039 5.969,30.302 v1(5.969,29.82) ; J1.15 10.836,21.27 10.871,21.26 12.471,22.86 12.471,27.965 v1(11.328,29.108)
UART1_TX: J1.17 J3.4 | length 21.5
  Top Layer w0.203: v1@6.384,21.885 6.401,21.895 8.28,20.015 v1(10.871,20.015)
  Bottom Layer w0.203: J3.4 5.459,31.547 6.528,30.478 6.528,22.165 6.316,21.953 v1@6.384,21.885 ; J1.17 10.856,20 v1(10.871,20.015)
  other v1: 6.38,21.885
UART2_CTS: J1.14 R4.2 | length 29.2
  Top Layer w0.203: v1(5.461,22.555) 5.448,22.568 4.801,21.92 4.801,20.96 7.645,18.115 7.645,11.608 4.648,8.611 4.648,3.832 5.537,2.943 5.537,1.898 6.445,0.991 8.001,0.991 8.23,1.219 8.23,1.674 R4.2
  Bottom Layer w0.203: J1.14 5.461,22.54 v1(5.461,22.555)
UART2_RTS: J1.12 R3.2 | length 2.5
  Bottom Layer w0.203: R3.2 3.528,23.803 3.556,23.774 J1.12
UART2_RX: J1.16 R1.2 | length 24.8
  Top Layer w0.203: v1(5.461,21.285) 5.486,21.285 8.204,18.567 8.204,11.454 5.08,8.329 5.08,3.937 6.045,2.972 6.045,1.905 6.274,1.676 6.731,1.676 R1.2
  Bottom Layer w0.203: J1.16 5.446,21.27 v1(5.461,21.285)
UART2_TX: J1.18 R2.2 | length 25.3
  Bottom Layer w0.203: J1.18 3.658,20.091 3.627,20.091 1.753,20.091 0.404,21.44 0.404,34.491 0.991,35.077 4.191,35.077 5.819,33.449 R2.2
WAKEUP_GPS: J1.31 U1.4 | length 11.4
  Top Layer w0.203: v1(10.643,6.68) 9.525,6.68 8.89,7.315 8.89,8.23 9.423,8.763 10.414,8.763 10.922,9.271 v1(10.922,11.1)
  Bottom Layer w0.203: J1.31 9.093,11.1 v1(10.922,11.1) ; v1(10.643,6.68) 10.643,5.817 10.947,5.512 11.862,5.512 U1.4
pads on no net: E1.3 E1.4 U1.2 U1.5 U1.10 U1.11 U1.12 U1.13 U1.14 U1.16 U1.17 U1.22 U1.23 U1.24 U1.25 U1.26 U1.27 U1.28 U1.29 U2.14 U2.15 U2.16 U2.17 U2.18 U2.19 U2.20 U2.25 U2.41 U2.42 U3.5 U4.4 U4.6 U4.8
copper on no net: | length 10.8
  Bottom Layer w0.75: 22.022,44.907 18.009,40.894 23.089,40.894

## Polygon pours and split planes (outlines as drawn)
GND on Bottom Layer "Top Layer-No Net" (solid, remove dead copper, pour order 1007): 15.062,30.734 27.178,30.734 27.178,25.4 15.062,25.4
GND on Bottom Layer "Top Layer-No Net1" (solid, remove dead copper, pour order 1009): 25.476,39.817 29.489,39.817 29.489,0.168 25.476,0.168
GND on Bottom Layer "Top Layer-No Net" (solid, remove dead copper, pour order 1008): 15.443,4.724 26.772,4.724 26.772,2.032 15.443,2.032
GND on Bottom Layer "Bottom Layer-No Net2" (solid, remove dead copper, pour order 1005): 0.281,39.7 27.381,39.7 27.381,28.634 15.919,28.634 15.919,26.365 26.743,26.365 27.115,26.365 27.089,26.339 27.089,4.538 15.679,4.538 15.679,2.294 26.849,2.294 26.849,0.152 0.254,0.152 0.254,26.824 2.116,26.824 2.116,34.83 0.281,34.83 0.281,39.7
GND on Bottom Layer "Top Layer-No Net" (solid, remove dead copper, pour order 1004): 0.279,35.154 2.235,35.154 2.235,26.772 0.279,26.772 0.279,35.154
GND on Top Layer "Top Layer-No Net1" (solid, remove dead copper, pour order 1006): 26.086,39.827 29.489,39.827 29.489,0.178 26.086,0.178
GND on Top Layer "Top Layer-No Net2" (solid, remove dead copper, pour order 1002): 26.34,39.726 26.314,39.7 26.314,22.098 23.05,22.098 23.05,8.103 26.391,8.103 26.391,0.279 0.178,0.279 0.178,26.822 1.963,26.822 1.963,35.255 0.178,35.255 0.178,39.7
GND on Top Layer "Top Layer-No Net" (solid, remove dead copper, pour order 1003): 0.33,35.484 2.261,35.484 2.261,26.721 0.33,26.721 0.33,35.484
GND on Top Layer "Top Layer-No Net3" (solid, remove dead copper, pour order 1000): 22.809,15.977 26.695,15.977 26.695,7.772 22.809,7.772
GND on Top Layer "Top Layer-No Net1_1" (solid, remove dead copper, pour order 1001): 22.987,22.428 25.806,22.428 25.806,15.85 22.987,15.85
GND on Top Layer "Top Layer-No Net1_1" (solid, remove dead copper, pour order 1001): 25.781,22.301 27.33,22.301 27.33,15.723 25.781,15.723

## Keep-outs
Keep-Out Layer:
  the board outline again, w0.3

## Silkscreen, mask and mechanical layers (free items; w line width, h text height)
Bottom Overlay:
  drawing of 4149 lines, arcs and shapes, not listed
  text "GSM+GPS" at 33.833,14.554 h1.52 r90
  text "Board" at 36.17,13.437 h1.52 r90
  text "EPOSMote II" at 4.654,-20.382 h1.52
Mechanical 1:
  lines w0.3: 0.076,-0.025 40.076,-0.025 ; 0,40 40,40 ; 0,40 40,40 ; 0,40 0,0 40,0 ; 40,0 40,40 ; 40,0 40,40
Mechanical 2:
  circle w0.001: c3,2.995 r3
  circle w0.001: c3,37 r3
Drill Drawing:
  lines w0.254: -25.141,-0.025 -9.647,-0.025 ; -16.891,40 -1.397,40 ; -11.933,-0.533 -11.425,-0.025 ; -11.933,0.483 -11.425,-0.025 ; -3.683,39.492 -3.175,40 ; -3.683,40.508 -3.175,40 ; -11.425,-0.025 -11.679,-0.533 -11.171,-0.025 ; -11.425,-0.025 -11.679,0.483 -11.171,-0.025 ; -11.171,-0.025 -11.425,-0.533 -10.917,-0.025 ; -11.171,-0.025 -11.425,0.483 -10.917,-0.025 ; -10.917,-0.025 -10.917,-0.279 -10.409,-0.025 -10.917,0.229 -10.917,-0.025 ; -9.647,-0.025 -12.187,-0.787 -11.679,-0.025 -12.187,0.737 -9.647,-0.025 ; -3.175,40 -3.429,40.508 -2.921,40 ; -3.175,40 -3.429,39.492 -2.921,40 ; -2.921,40 -3.175,40.508 -2.667,40 ; -2.921,40 -3.175,39.492 -2.667,40 ; -2.667,40 -2.667,40.254 -2.159,40 -2.667,39.746 -2.667,40 ; -1.397,40 -3.937,40.762 -3.429,40 -3.937,39.238 -1.397,40
  text "V-CUT" at -16.891,40.762 h1.52
  text "V-CUT" at -25.141,0.737 h1.52

## Dimensions
0,0 to -0.25,5.25 on Drill Drawing
0.076,-0.025 to 40.076,-0.025 on Drill Drawing

## Text inside footprints (layer, text, board x,y; h text height)
E1: Top Overlay "L1" at 31.826,20.168 h0.75 r270
J1: Bottom Overlay "1" at 8.877,31.91 h1 r270; Bottom Overlay "33" at 8.627,6.91 h1.02 r270; Bottom Overlay "34" at 3.127,6.91 h1.02 r270; Bottom Overlay "2" at 3.127,31.91 h1.02 r270